# Altium PCB UPCNSL-ABS-FLS-RFS.PcbDoc
Units mm, origin at the board's own origin, x right, y up, seen from the top; angles counter-clockwise.
Board outline 96 x 90 mm, 2 copper layers (Top Layer, Bottom Layer), stack 1.671 mm thick; 44 components, 32 nets, 209 pads, 165 vias.
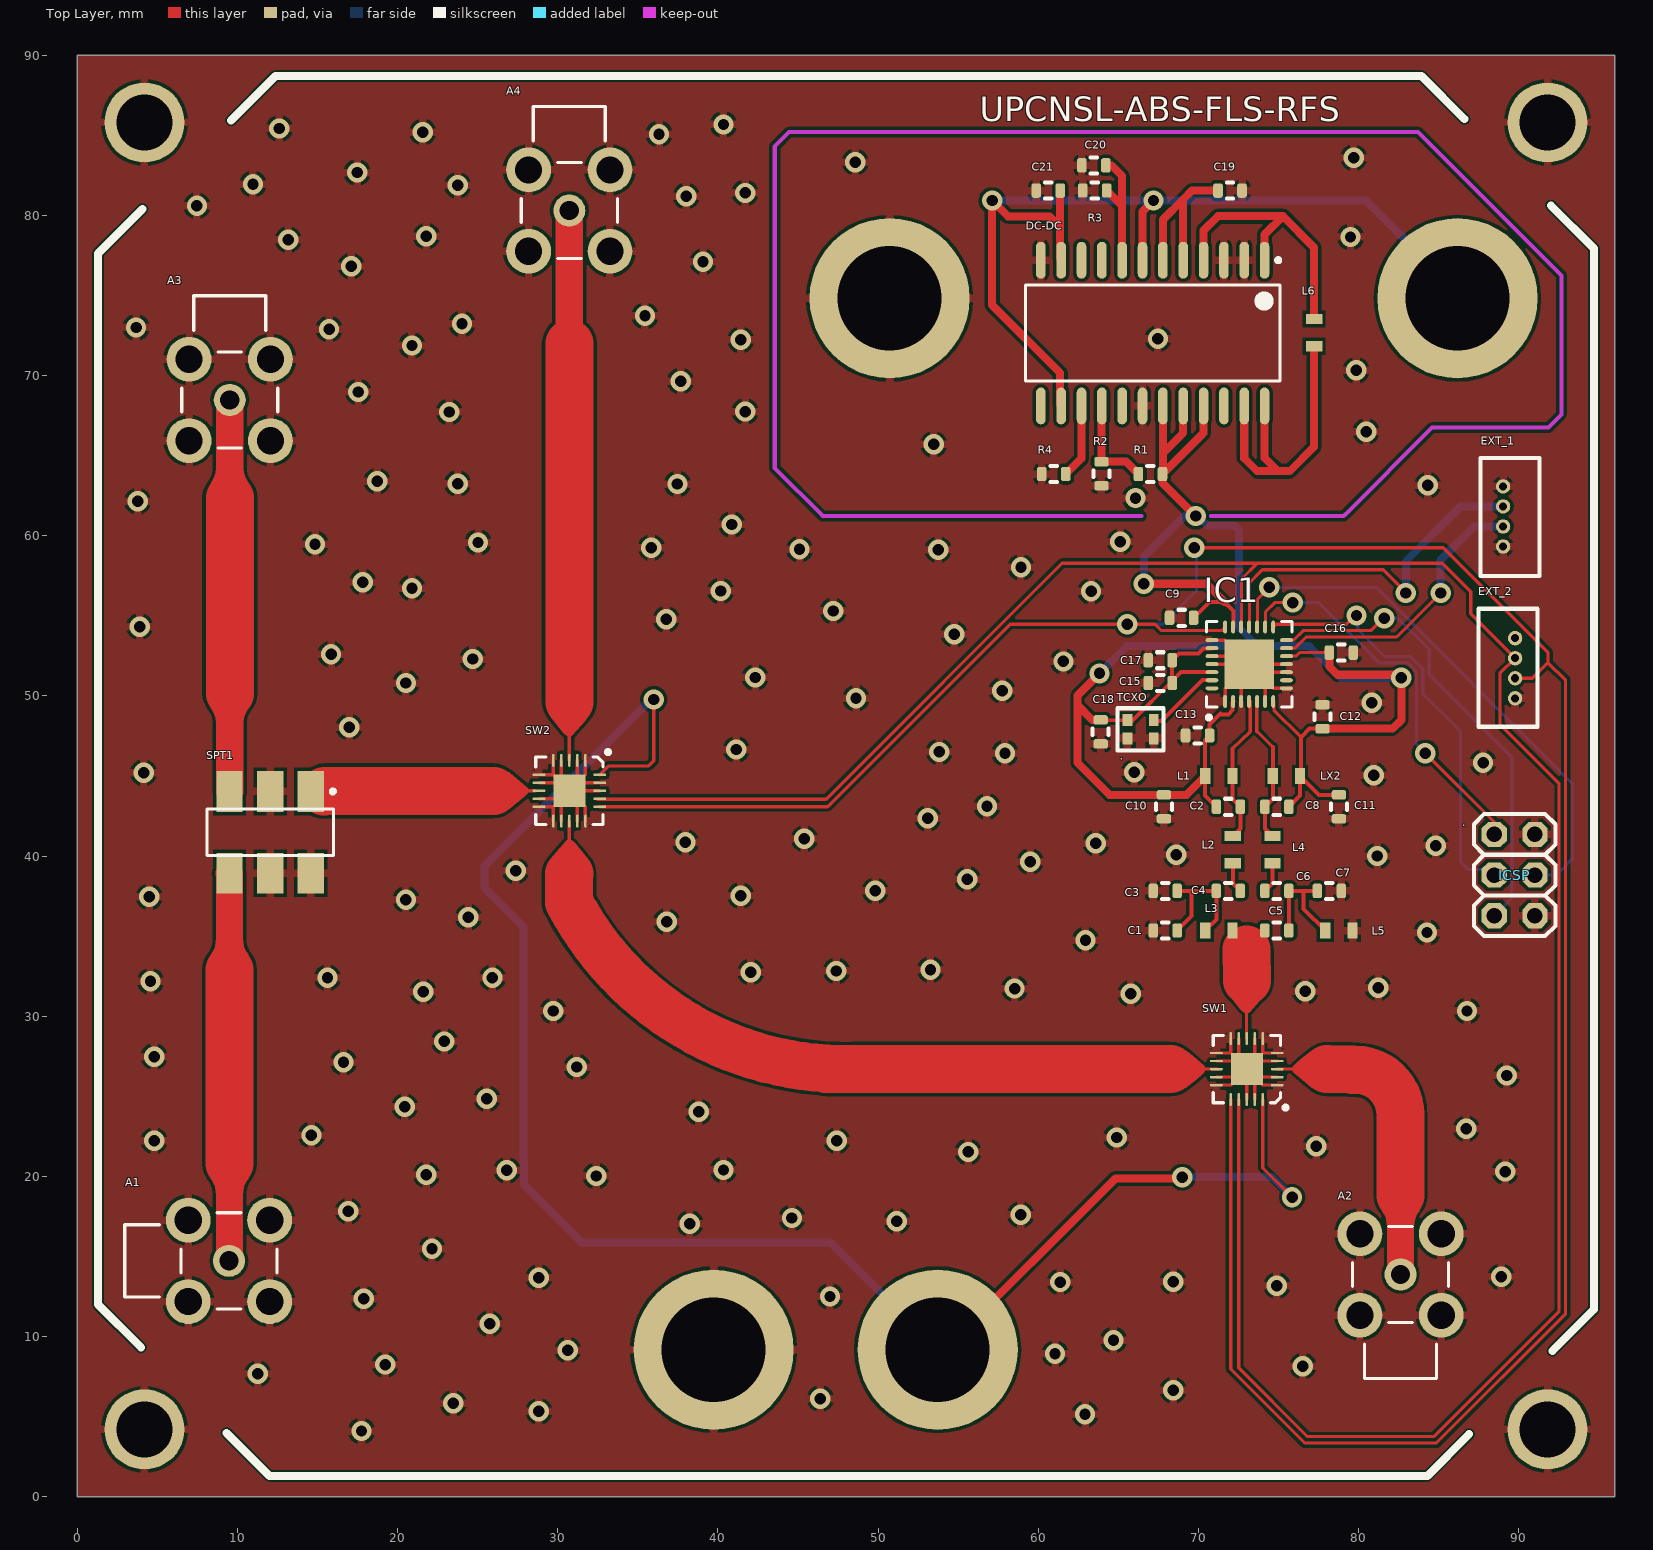
[diagram p0: Top Layer view]
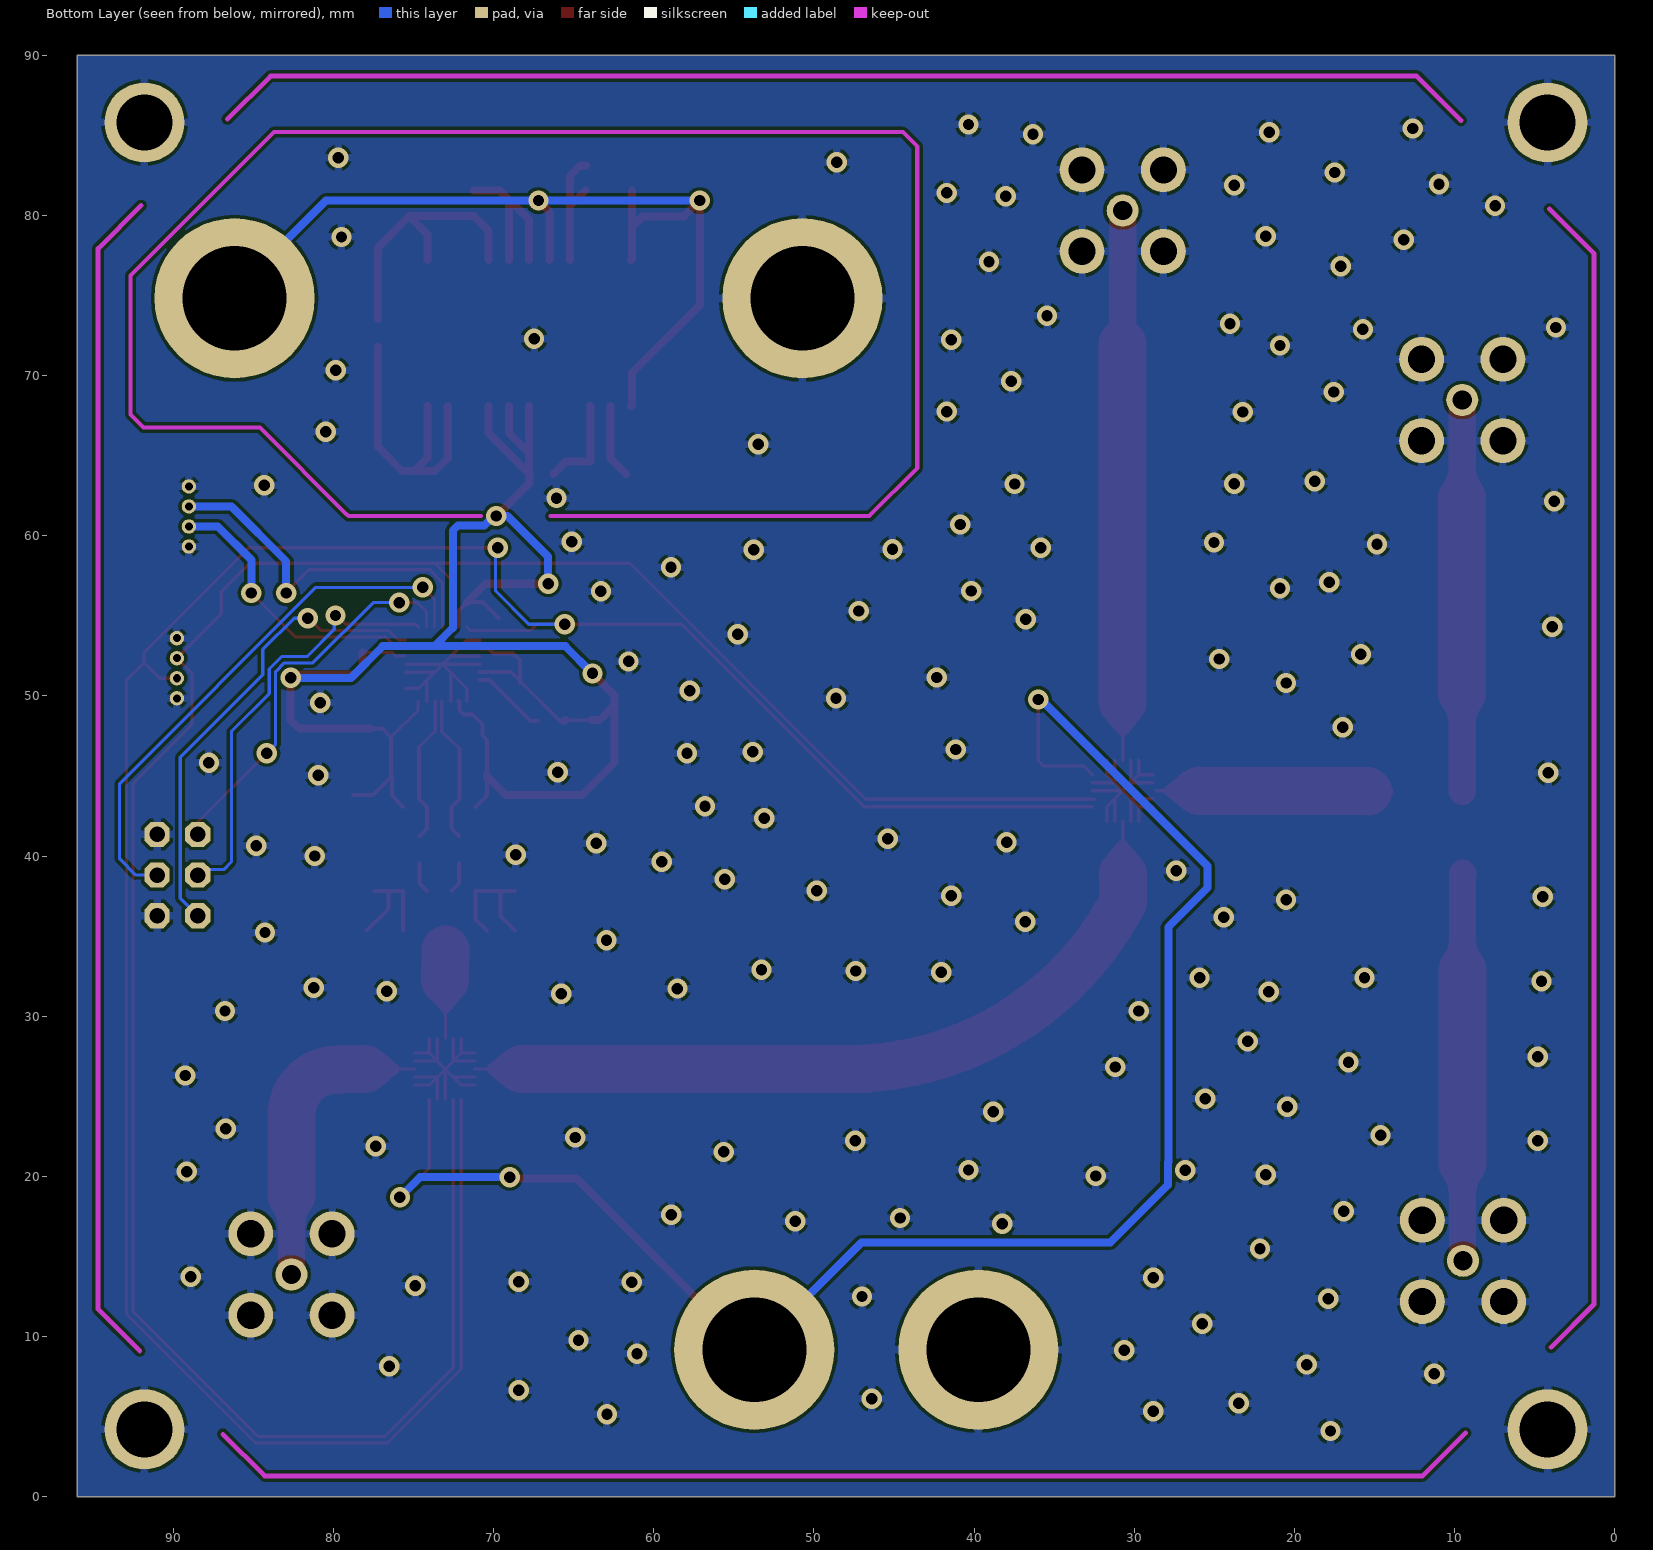
[diagram p1: Bottom Layer view, seen from below]
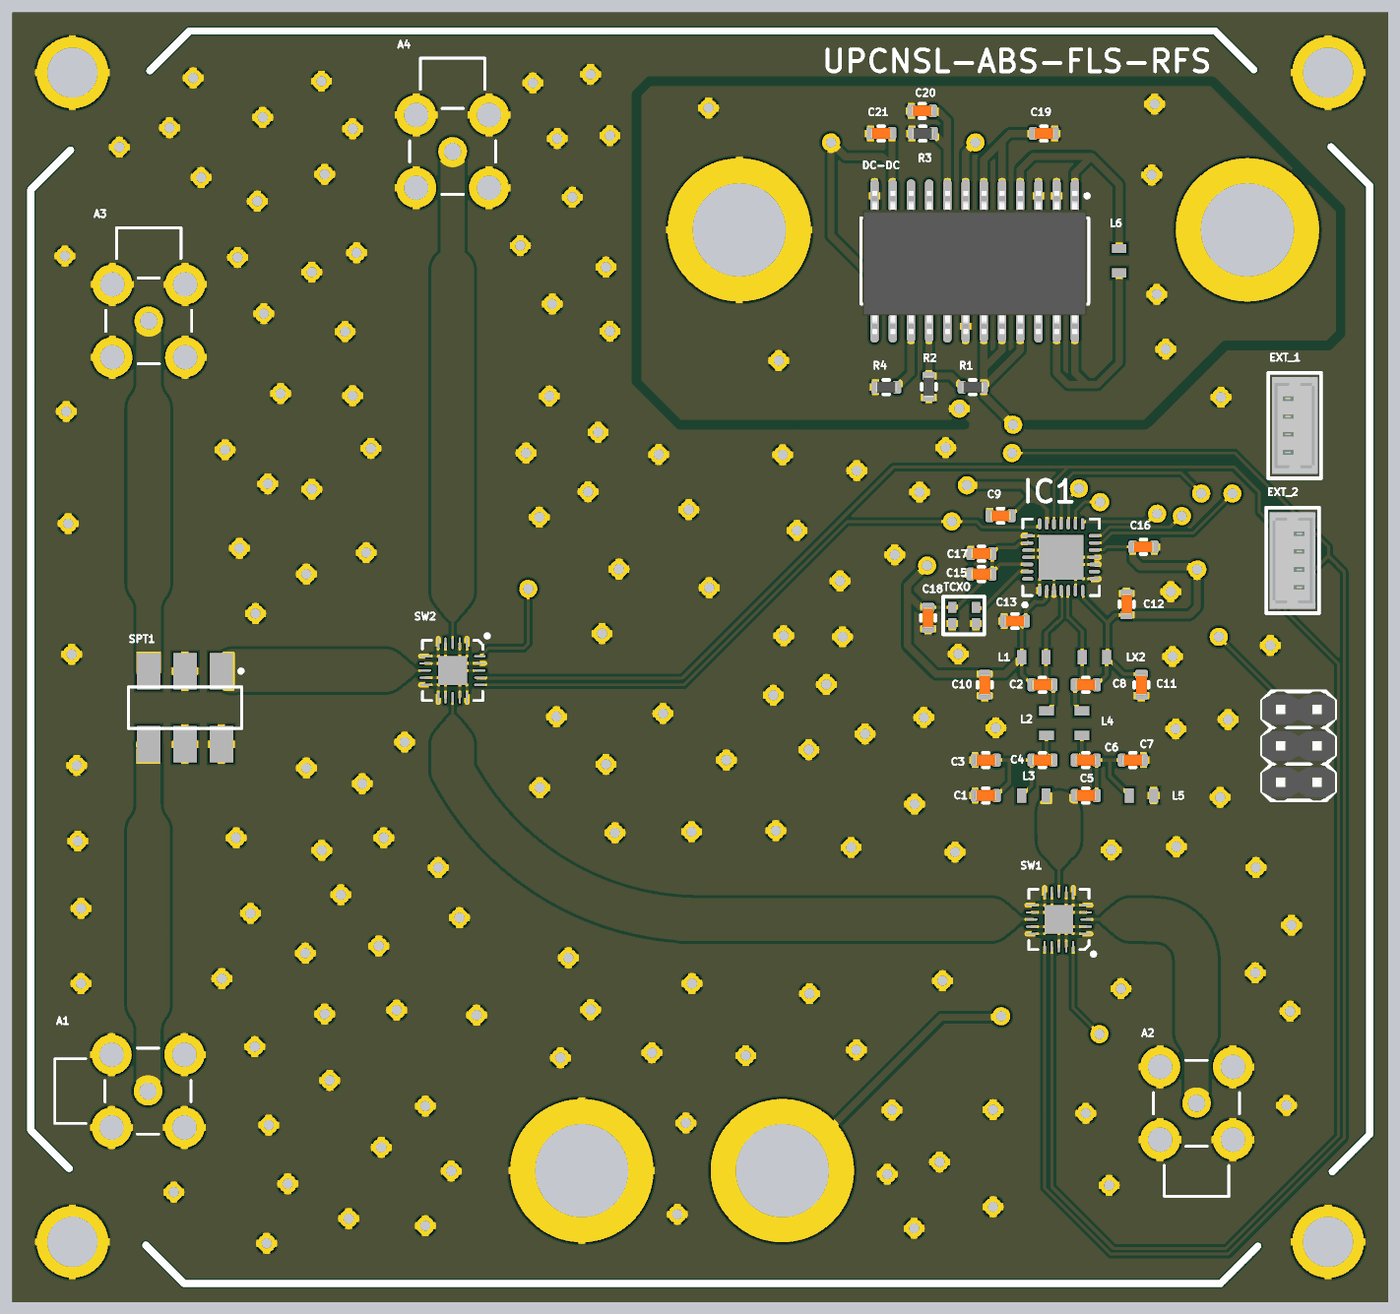
[diagram p2: 3D render of the assembled board from above, using the file's embedded part models]

## Layer stack, top to bottom
Top Solder: solder mask 0.0102, Solder Resist, Dk 3.5
Top Layer: signal copper 0.0356
Dielectric 1: core 1.6, FR-4, Dk 4.2
Bottom Layer: signal copper 0.0356
Bottom Solder: solder mask 0.0102, Solder Resist, Dk 3.5

## Board outline
0,0 96,0 96,90 0,90

## Design rules (kind name [scope] priority, off if disabled: settings)
Clearance [All] p1: gap=0.2
PlaneConnect [All] p1: planeconnectstyle=Relief reliefexpansion=0.508 reliefentries=4 reliefconductorwidth=0.5 reliefairgap=0.254
PolygonConnect [All] p1: connectstyle=Relief reliefconductorwidth=0.5 reliefentries=4 polygonreliefangle="90 Angle" airgapwidth=0.2
RoutingVias [All] p1: holewidth=0.6 width=1 viastyle="Through Hole" minholewidth=0.711 minwidth=1.27 maxholewidth=0.711 maxwidth=1.27
SolderMaskExpansion [All] p1: expansion=0.102
UnpouredPolygon [All] p1: allowunpoured=FALSE
Width [All] p1: maxlimit=2.997 minlimit=0.2 preferedwidth=0.2
28 further rules are at their usual default settings.

## Components (designator, comment, footprint, x,y, rotation, side; value= is the part's Value field where it differs from the comment)
A1 "ANTENNA" MCX5.08-H5 9.475,14.725 r0 top
A2 "SORTIDA AMP EXTERN" MCX5.08-H5 82.625,13.875 r90 top
A3 "ANTENNA" MCX5.08-H5 9.525,68.475 r270 top
A4 "ENTRADA AMP EXTERN" MCX5.08-H5 30.725,80.3 r270 top
C1 "CB1" CAP0603 67.925,35.35 r180 top
C2 "CC1" CAP0603 71.873,43.075 r180 top
C3 "CM1" CAP0603 67.925,37.825 r180 top
C4 "CT1" CAP0603 71.873,37.825 r0 top
C5 "CT2" CAP0603 74.902,37.825 r180 top
C6 "CB2" CAP0603 74.902,35.35 r0 top
C7 "CM2" CAP0603 78.177,37.825 r0 top
C8 "CC2" CAP0603 74.902,43.075 r180 top
C9 "CV1" CAP0603 68.95,54.875 r0 top
C10 "Cap" CAP0603 67.85,43.075 r90 top
C11 "Cap" CAP0603 78.775,43.075 r270 top
C12 "Cap" CAP0603 77.75,48.7 r90 top
C13 "Cap" CAP0603 69.95,47.525 r180 top
C15 "Cap" CAP0603 67.619,50.804 r180 top
C16 "Cap" CAP0603 78.925,52.7 r180 top
C17 "Cap" CAP0603 67.619,52.225 r0 top
C18 "Cap" CAP0603 63.9,47.75 r90 top
C19 "CAP0603" CAP0603 71.975,81.55 r180 top
C20 "CAP0603" CAP0603 63.475,83.125 r0 top
C21 "CAP0603" CAP0603 60.625,81.55 r180 top
DC-DC "LTC3128" "DW024 (LTC3128)" 67.15,72.65 r270 top
EXT_1 "HEADER_CONNECTION" HEADER_CONNECTION 89.025,63.075 r270 top
EXT_2 "HEADER_CONNECTION" HEADER_CONNECTION 89.775,49.85 r90 top
IC1 "AX5042" AX5042 73.175,51.975 r90 top
ICSP "3X2M" "Header 3x2" 88.475,41.35 r0 top
L1 "LX1" INDUCTOR(1608) 71.275,45 r0 top
L2 "LT1" INDUCTOR(1608) 72.15,40.4 r270 top
L3 "LB2" INDUCTOR(1608) 71.275,35.35 r0 top
L4 "LT2" INDUCTOR(1608) 74.625,40.4 r90 top
L5 "LB1" INDUCTOR(1608) 78.775,35.35 r180 top
L6 "Inductor" INDUCTOR(1608) 77.225,72.675 r270 top
LX2 "LX2" INDUCTOR(1608) 75.5,45 r0 top
R1 "RES0603" RES0603 67.008,63.85 r0 top
R2 "RES0603" RES0603 63.95,63.875 r90 top
R3 "RES0603" RES0603 63.525,81.55 r0 top
R4 "RES0603" RES0603 60.975,63.85 r0 top
SPT1 "2 Way -0º split" "SOTFL254P691X411-6N(splitter 2 way-0)" 12.05,41.48 r270 top
SW1 "Switch" SWITCH 73.025,26.7 r180 top
SW2 "Switch" SWITCH 30.725,44.075 r270 top
TCXO "CRYSTAL" "CRYSTAL TG-5006CJ-24L" 65.575,47.35 r0 top

## Footprints (in the part's own frame and the unit in brackets; to place one, negate y for a bottom-side part, rotate by r counter-clockwise, add the part's x,y. Pads: shape width x height; smd on the part's side, far side on the other; paste and mask are expansions set on the pad)
AX5042 [mm] "AXSEM transceiver for RF comm"
  oval 0.8x0.25 smd: 1(-2.325,1.5) 2(-2.325,1) 3(-2.325,0.5) 4(-2.325,0) 5(-2.325,-0.5) 6(-2.325,-1) 7(-2.325,-1.5) 15(2.325,-1.5) 16(2.325,-1) 17(2.325,-0.5) 18(2.325,0) 19(2.325,0.5) 20(2.325,1) 21(2.325,1.5)
  oval 0.25x0.8 smd: 8(-1.5,-2.325) 9(-1,-2.325) 10(-0.5,-2.325) 11(0,-2.325) 12(0.5,-2.325) 13(1,-2.325) 14(1.5,-2.325) 22(1.5,2.325) 23(1,2.325) 24(0.5,2.325) 25(0,2.325) 26(-0.5,2.325) 27(-1,2.325) 28(-1.5,2.325)
  rect 3.1x3.1 smd: 29(0,0)
  silkscreen extent -3.45,-2.68 2.68,2.67, body extent -2.52,-2.53 2.53,2.52, height 0.9
CAP0603 [mm] "Capacitor Chip Inductor, Body 0.6x0.3mm, IPC High Density"
  rrect50% 0.6x0.9 smd: 1(-0.75,0) 2(0.75,0)
  silkscreen extent -0.2,-0.5 0.2,0.5, body extent -0.76,-0.38 0.76,0.38, height 0.76
"CRYSTAL TG-5006CJ-24L" [mm] "MINIATURE SIZE LOW PROFILE  HIGH STABILITY 13-52 MHz"
  rect 0.6x0.75 smd: 1(0,0) 2(1.65,0) 3(1.65,1.13) 4(0,1.13)
  silkscreen extent -0.63,-0.75 2.25,1.88, body extent -0.13,-0.38 1.88,1.5, height 0.8
"DW024 (LTC3128)" [mm] "24-Pin Plastic Small Outline Integrated Circuit 1.27 mm Pitch, IPC Medium Density"
  oval 2.3x0.6 smd: 1(-4.55,6.985) 2(-4.55,5.715) 3(-4.55,4.445) 4(-4.55,3.175) 5(-4.55,1.905) 6(-4.55,0.635) 7(-4.55,-0.635) 8(-4.55,-1.905) 9(-4.55,-3.175) 10(-4.55,-4.445) 11(-4.55,-5.715) 12(-4.55,-6.985) 13(4.55,-6.985) 14(4.55,-5.715) 15(4.55,-4.445) 16(4.55,-3.175) 17(4.55,-1.905) 18(4.55,-0.635) 19(4.55,0.635) 20(4.55,1.905) 21(4.55,3.175) 22(4.55,4.445) 23(4.55,5.715) 24(4.55,6.985)
  silkscreen extent -4.67,-7.95 3,7.96, body extent -4.9,-7.8 5.1,7.8, height 2.77
"Header 3x2" [mm]
  oct 1.575x1.575 hole 0.965: 1(0,0) 2(2.54,0) 3(0,-2.54) 4(2.54,-2.54) 5(0,-5.08) 6(2.54,-5.08)
  silkscreen extent -1.27,-6.35 3.81,1.27, body extent -1.27,-6.35 3.81,1.27, height 8.38
HEADER_CONNECTION [mm] "Headers to extarnal connections (power, signals,...)"
  round 0.9 hole 0.5: 1(0,0) 2(1.25,0) 3(2.5,0) 4(3.75,0)
  silkscreen extent -1.78,-1.4 5.59,2.29, body extent -1.47,-1.15 5.28,2.05, height 4.2
INDUCTOR(1608) [mm] "Inductor for pack 1608"
  rect 0.64x1.02 smd: 1(-0.85,0) 2(0.85,0)
  body extent -0.9,-0.56 0.9,0.56, height 1.02
MCX5.08-H5 [mm] "Connector; RF Coaxial, MCX, Thru-Hole; 5 Position; Right-Angle"
  round 2 hole 1.2: 1(0,0)
  round 2.8 hole 1.7: 2(-2.54,-2.54) 3(2.54,-2.54) 4(2.54,2.54) 5(-2.54,2.54)
  silkscreen extent -6.5,-3 3,3
RES0603 [mm] "Resistor Chip Inductor, Body 0.6x0.3mm, IPC High Density"
  rrect50% 0.6x0.9 smd: 1(-0.75,0) 2(0.75,0)
  silkscreen extent -0.2,-0.5 0.2,0.5, body extent -0.76,-0.38 0.76,0.38, height 0.76
"SOTFL254P691X411-6N(splitter 2 way-0)" [mm] "Splitter for 2 antenna"
  rect 2.54x1.65 smd: 1(-2.55,2.54) 2(-2.55,0) 3(-2.55,-2.54) 4(2.55,-2.54) 5(2.55,0) 6(2.55,2.54)
  silkscreen extent -2.67,-3.95 1.45,4.04, body extent -2.79,-3.94 2.79,3.94, height 4.11
SWITCH [mm] "switch for tx/rx selection"
  oval 0.81x0.15 smd: 1(-1.9,1) 2(-1.9,0.5) 3(-1.9,0) 4(-1.9,-0.5) 5(-1.9,-1) 11(1.9,-1) 12(1.9,-0.5) 13(1.9,0) 14(1.9,0.5) 15(1.9,1)
  oval 0.15x0.81 smd: 6(-1,-1.9) 7(-0.5,-1.9) 8(0,-1.9) 9(0.5,-1.9) 10(1,-1.9) 16(1,1.9) 17(0.5,1.9) 18(0,1.9) 19(-0.5,1.9) 20(-1,1.9)
  rect 2x2 smd: Paddle(0,0)
  silkscreen extent -2.54,-2.1 2.1,2.54, body extent -2,-2 2,2, height 0.9

## Part data
A1 A2 A3 A4: library part COAX-F, "RF Coaxial PCB Connector, MCX; Thru-Hole, Right-Angle Mount Socket, Blunt Post Terminal, 50 Ohm Impedance"
C1 C2 C3 C4 C5 C6 C7 C8 C9: library part Cap, "Capacitor"
C10 C11 C12 C13 C15 C16 C17 C18 C19 C20 C21: "Capacitor"
ICSP: library part "HEADER 3X2", "PIN HEADER"
L1 L2 L3 L4 L5 LX2: library part Inductor, "Inductor"
R1 R2 R3 R4: "Resistor"
SPT1: library part "2 WAY-0º", "Splitter with 0º phase"
SW1 SW2: library part SWITCH

## Free pads (board coordinates)
  round 10 hole 6.5: 0(50.725,74.825) 5(86.175,74.825) 6(53.725,9.175) 7(39.737,9.175)
  round 5 hole 3.5: 8(4.2,85.8) 9(91.8,85.8) 10(91.8,4.2) 11(4.2,4.2)

## Via types
v1: diameter 1.27, hole 0.711, Top Layer to Bottom Layer, 165 vias

## Nets (pads, with @x,y where several pads share a name; then routed paths per layer and width w, separated by ;. In a path a pad name is that pad's centre, name@x,y a point inside that pad or via, vN(x,y) a via of type N, cw(c..) or ccw(c..) an arc to the next point about the centre after c; other vN are vias at no path point)
3V3: pad.6 SW1.20 SW2.20 | length 107.4
  Top Layer w0.2: SW2.20 33.175,45.625 35.675,45.625 36,45.95 v1(36,49.775) ; SW1.20 74.025,20.525 v1(75.85,18.7)
  Top Layer w0.5: pad.6 54.125,9.175 64.825,19.875 68.925,19.875 v1(69,19.95)
  Bottom Layer w0.5: v1(36,49.775) 35.825,49.775 25.425,39.375 25.425,38.025 27.875,35.575 27.875,20.894 27.91,20.859 27.91,19.465 31.5,15.875 47.025,15.875 pad.6 ; v1(69,19.95) 74.6,19.95 v1(75.85,18.7)
5V: C21.1 DC-DC.7 DC-DC.11 DC-DC.14 pad.5 | length 59.7
  Top Layer w0.5: C21.1 61.375,79.25 ; DC-DC.14 61.375,68.16 61.375,70.15 57.125,74.4 v1(57.125,80.925) 58.125,79.925 60.7,79.925 61.375,79.25 ; DC-DC.11 61.375,77.26 61.375,79.25 ; DC-DC.7 66.515,80.24 v1(67.2,80.925)
  Bottom Layer w0.5: v1(57.125,80.925) v1(67.2,80.925) 80.475,80.925 86.175,75.225 pad.5
ANTN: C8.2 IC1.5 L4.2 LX2.1 | length 9.2
  Top Layer w0.2: 73.644,47.762 IC1.5@73.644,49.671 ; 73.694,47.762 74.65,46.806
  Top Layer w0.25: L4.2 74.152,41.723 C8.2 74.65,43.573 LX2.1 74.65,46.806
ANTP: C2.1 IC1.4 L1.2 L2.1 | length 9.3
  Top Layer w0.2: 72.125,46.7 73.244,47.769 IC1.4@73.244,49.671
  Top Layer w0.25: 72.125,46.7 L1.2 72.125,43.573 C2.1 72.623,41.723 L2.1
CLK: IC1.15 ICSP.3 | length 26.9
  Top Layer w0.2: IC1.15@74.694,54.321 74.848,54.475 79.25,54.475 79.8,55.025 79.865,55.025 v1(79.875,55.015)
  Bottom Layer w0.2: v1(79.875,55.015) 79.885,55.015 79.95,54.95 79.95,54.15 81.64,52.46 83.228,52.46 84.01,51.678 84.01,50.14 86.375,47.775 86.375,39.625 86.85,39.15 88.135,39.15 ICSP.3
DATA: EXT_1.2 IC1.18 | length 22.8
  Top Layer w0.2: IC1.18@73.194,54.321 73.194,57.069 74,57.875 81.55,57.875 v1@82.95,56.475
  Bottom Layer w0.5: v1@82.95,56.475 82.95,58.4 86.375,61.825 EXT_1.2
  other v1: 82.95,56.425
DCLK: EXT_2.2 IC1.21 SW1.16 SW2.16 | length 163.8
  Top Layer w0.2: SW2.16 46.85,43.075 58.25,54.475 v1(65.55,54.475) 67.3,54.475 67.7,54.075 71.448,54.075 IC1.21@71.694,54.321 ; v1@69.875,59.25 85.3,59.25 91.825,52.725 91.825,52.075 ; SW1.16 72.025,7.975 76.65,3.35 84.85,3.35 92.925,11.425 92.925,50.975 91.825,52.075 ; EXT_2.2 90.85,51.1 91.825,52.075
  Bottom Layer w0.2: v1(65.55,54.475) 67.8,54.475 69.875,56.55 v1@69.875,59.25
  other v1: 69.75,59.25
GND: A1.2 A1.3 A1.4 A1.5 A2.2 A2.3 A2.4 A2.5 A3.2 A3.3 A3.4 A3.5 A4.2 A4.3 A4.4 A4.5 C1.2 C3.2 C7.2 C9.1 C10.1 C11.2 C12.2 C13.2 C15.2 C16.1 C17.1 C18.1 C19.1 C20.1 C21.2 DC-DC.2 DC-DC.3 DC-DC.12 DC-DC.18 EXT_1.1 EXT_1.4 EXT_2.1 EXT_2.4 IC1.1 IC1.3 IC1.6 IC1.8 IC1.10 IC1.11 IC1.22 IC1.24 IC1.25 IC1.29 ICSP.2 ICSP.6 L5.1 pad.0 pad.7 pad.8 pad.9 pad.10 pad.11 R2.1 R3.1 R4.1 SPT1.2 SPT1.5 SPT1.6 SW1.1 SW1.2 SW1.4 SW1.5 SW1.6 SW1.7 SW1.9 SW1.10 SW1.11 SW1.12 SW1.14 SW1.15 SW1.18 SW1.19 SW1.Paddle SW2.1 SW2.2 SW2.4 SW2.5 SW2.6 SW2.7 SW2.9 SW2.10 SW2.11 SW2.12 SW2.14 SW2.15 SW2.18 SW2.19 SW2.Paddle TCXO.1 TCXO.2 | length 65.8
  Top Layer w0.2: SW2.10 SW2.Paddle@29.725,43.075 ; SW2.9 SW2.Paddle@30.225,43.575 ; SW2.7 SW2.Paddle@30.225,44.575 ; SW2.6 SW2.Paddle@29.725,45.075 ; SW2.11 SW2.Paddle@29.725,43.075 ; SW2.5 29.725,45.075 ; SW2.12 SW2.Paddle@30.225,43.575 ; SW2.4 SW2.Paddle@30.225,44.575 ; SW2.14 SW2.Paddle@31.225,43.575 ; SW2.2 SW2.Paddle@31.225,44.575 ; SW2.15 31.725,43.075 SW2.Paddle@31.225,43.575 ; SW2.1 31.725,45.075 SW2.Paddle@31.225,44.575 ; SW2.18 SW2.Paddle ; SW2.19 SW2.Paddle@31.225,44.575 ; IC1.25 IC1.29 ; IC1.24 IC1.29@72.675,52.475 ; IC1.22 71.675,53.475 IC1.29@72.675,52.475 ; SW1.15 72.025,25.7 SW1.Paddle@72.525,26.2 ; SW1.14 SW1.Paddle@72.525,26.2 ; SW1.12 SW1.Paddle@72.525,27.2 ; SW1.11 72.025,27.7 ; IC1.1 71.675,50.475 IC1.29@72.675,51.475 ; SW1.10 72.025,27.7 ; SW1.9 SW1.Paddle@72.525,27.2 ; IC1.3 IC1.29@72.675,51.475 ; SW1.18 SW1.Paddle ; SW1.19 SW1.Paddle@73.525,26.2 ; SW1.7 SW1.Paddle@73.525,27.2 ; SW1.6 SW1.Paddle@74.025,27.7 ; IC1.6 IC1.29@74.175,50.975 ; SW1.1 74.025,25.7 SW1.Paddle@73.525,26.2 ; SW1.2 SW1.Paddle@73.525,26.2 ; SW1.4 SW1.Paddle@73.525,27.2 ; SW1.5 74.025,27.7 ; IC1.8 74.675,50.475 IC1.29@74.175,50.975 ; IC1.10 IC1.29@73.675,51.475 ; IC1.11 IC1.29 ; SW2.Paddle@29.725,43.075 SW2.Paddle@30.225,43.575 ; SW2.Paddle@29.725,45.075 SW2.Paddle@30.225,44.575 ; SW2.Paddle@30.225,43.575 SW2.Paddle ; SW2.Paddle@30.225,44.575 SW2.Paddle ; SW2.Paddle SW2.Paddle@31.225,44.575 ; SW2.Paddle SW2.Paddle@31.225,43.575 ; 72.025,27.7 SW1.Paddle@72.525,27.2 ; SW1.Paddle@72.525,26.2 SW1.Paddle ; SW1.Paddle@72.525,27.2 SW1.Paddle ; IC1.29@72.675,51.475 IC1.29 ; IC1.29@72.675,52.475 IC1.29 ; SW1.Paddle SW1.Paddle@73.525,26.2 ; SW1.Paddle SW1.Paddle@73.525,27.2 ; IC1.29 IC1.29@73.675,51.475 ; SW1.Paddle@73.525,27.2 SW1.Paddle@74.025,27.7 ; IC1.29@73.675,51.475 IC1.29@74.175,50.975
  other v1: 17.75,4.1 62.925,5.15 28.825,5.325 23.475,5.825 46.4,6.125 68.425,6.65 11.275,7.675 76.525,8.15 19.225,8.25 61.05,8.925 30.625,9.15 64.7,9.775 25.75,10.8 17.9,12.35 47,12.5 74.9,13.175 61.375,13.4 68.425,13.425 28.825,13.675 88.9,13.725 22.15,15.475 38.25,17.05 51.175,17.2 44.625,17.4 58.9,17.6 16.925,17.825 32.4,20.025 21.8,20.1 89.15,20.3 26.825,20.375 40.35,20.4 55.625,21.525 77.35,21.875 4.8,22.225 47.425,22.225 64.9,22.425 14.625,22.575 86.725,22.975 38.8,24.025 20.45,24.35 25.575,24.85 89.25,26.3 31.2,26.825 16.625,27.125 4.8,27.475 22.925,28.425 29.725,30.325 86.775,30.325 65.775,31.4 21.6,31.525 76.675,31.55 58.525,31.725 81.225,31.775 4.575,32.175 15.625,32.4 25.925,32.4 42.05,32.75 47.4,32.825 53.275,32.9 62.95,34.75 84.275,35.225 36.8,35.9 24.425,36.175 20.525,37.275 4.5,37.45 41.425,37.525 49.825,37.825 55.575,38.55 27.375,39.075 59.5,39.65 81.175,40 68.625,40.075 84.825,40.65 63.6,40.8 37.975,40.85 45.4,41.075 53.1,42.35 56.8,43.1 80.95,45.05 4.15,45.2 66,45.225 87.775,45.825 57.925,46.425 53.825,46.5 41.15,46.65 16.975,48.05 80.825,49.575 48.625,49.85 57.75,50.325 20.525,50.8 42.325,51.15 61.575,52.15 24.7,52.3 15.85,52.6 54.75,53.85 3.9,54.325 36.775,54.775 47.2,55.3 63.3,56.525 40.175,56.55 20.9,56.725 17.825,57.1 58.925,58.025 53.75,59.125 45.1,59.15 35.85,59.25 14.85,59.475 25.025,59.575 65.125,59.625 40.875,60.7 3.775,62.15 66.075,62.35 84.325,63.15 37.475,63.225 23.75,63.25 18.725,63.4 53.475,65.7 80.475,66.5 23.225,67.725 41.7,67.75 17.55,68.975 37.675,69.65 79.85,70.325 20.9,71.875 41.425,72.225 67.475,72.3 15.725,72.9 3.675,73 24.025,73.225 35.45,73.725 17.1,76.825 39.075,77.1 13.175,78.475 79.5,78.65 21.8,78.7 7.475,80.6 38.025,81.2 41.7,81.4 23.75,81.875 10.975,81.95 17.475,82.675 48.575,83.325 79.7,83.6 36.325,85.075 21.575,85.2 12.625,85.425 40.35,85.675
IRQ: EXT_2.3 IC1.19 SW1.17 SW2.17 | length 155.2
  Top Layer w0.2: SW2.17@32.45,43.55 46.759,43.55 61.484,58.275 73.675,58.275 ; SW1.17 72.525,8.041 76.816,3.75 84.684,3.75 92.525,11.591 92.525,44.525 88.825,48.225 88.825,51.4 EXT_2.3 87,55.125 87,56.5 85.225,58.275 73.675,58.275 ; IC1.19@72.694,54.65 72.694,57.294 73.675,58.275
MISO: IC1.16 ICSP.1 | length 24.5
  Top Layer w0.2: IC1.16@74.194,54.321 74.194,55.244 74.775,55.825 v1(75.9,55.825) ; v1(84.175,46.425) 88.475,42.125 ICSP.1
  Bottom Layer w0.2: v1@75.9,55.431 v1(75.9,55.825) ; v1@76.325,55.825 77.525,55.825 81.29,52.06 83.062,52.06 83.61,51.512 83.61,46.99 v1(84.175,46.425)
MOSI: IC1.17 ICSP.4 | length 34
  Top Layer w0.2: IC1.17@73.694,54.321 73.694,56.044 v1(74.425,56.775)
  Bottom Layer w0.2: v1@74.6,56.775 81.1,56.775 93.35,44.525 93.35,39.825 92.335,38.81 ICSP.4
NetC1_1: C1.1 C3.1 C4.1 L3.1 | length 8.1
  Top Layer w0.25: C1.1 69.575,36.25 69.575,37.825 ; C3.1 69.575,37.825 ; L3.1 71.123,36.048 C4.1 69.575,37.825
NetC4_2: C4.2 L2.2 | length 1.9
  Top Layer w0.25: L2.2 72.15,38.298 C4.2
NetC5_1: C5.1 C6.2 C7.1 L5.2 | length 7.3
  Top Layer w0.25: C6.2 C5.1 76.575,37.825 ; C7.1 76.575,37.825 ; L5.2 76.575,36.7 76.575,37.825
NetC5_2: C5.2 L4.1 | length 1.9
  Top Layer w0.25: C5.2 74.625,38.298 L4.1
NetC19_2: C19.2 DC-DC.5 DC-DC.6 | length 10.5
  Top Layer w0.5: DC-DC.6 67.785,79.735 69.055,81.005 ; DC-DC.5 69.055,81.005 ; C19.2 69.6,81.55 69.055,81.005
NetC20_2: C20.2 DC-DC.8 R3.2 | length 7.9
  Top Layer w0.5: C20.2 64.575,83.125 65.245,82.455 65.245,80.58 ; R3.2 65.245,80.58 ; DC-DC.8 65.245,80.58
NetDC-DC_1: DC-DC.1 DC-DC.4 L6.1 | length 17.6
  Top Layer w0.5: DC-DC.4 70.325,79.05 71.225,79.95 75.275,79.95 ; DC-DC.1 74.135,78.81 75.275,79.95 ; L6.1 77.225,78 75.275,79.95
NetDC-DC_15: DC-DC.15 R4.2 | length 4.7
  Top Layer w0.5: R4.2 62.705,64.83 DC-DC.15
NetDC-DC_16: DC-DC.16 R1.1 R2.2 | length 6.1
  Top Layer w0.5: DC-DC.16 63.95,68.075 R2.2 65.483,64.625 R1.1
NetDC-DC_23: DC-DC.23 DC-DC.24 L6.2 | length 19.3
  Top Layer w0.5: DC-DC.23 72.865,64.835 73.675,64.025 74.975,64.025 ; DC-DC.24 74.135,64.865 74.975,64.025 ; L6.2 77.225,65.55 75.7,64.025 74.975,64.025
NetIC1_27: IC1.27 TCXO.3 | length 4.7
  Top Layer w0.25: TCXO.3@67.225,48.43 67.694,48.43 70.26,50.996 IC1.27@70.869,50.996
RF: C6.1 L3.2 SW1.8 | length 5.8
  Top Layer w0.2: SW1.8@73.012,28.6 73.025,32.475
  Top Layer w2.997: 73.016,34.175 73.025,32.225
RF_A1: A1.1 SPT1.4 | length 24.3
  Top Layer w1.7: A1.1 9.51,14.76 9.51,20.803 ; SPT1.4@9.475,38.895 SPT1.4 9.51,32.888
  Top Layer w2.997: 9.51,20.803 9.51,32.888
RF_A2: A2.1 SW1.3 | length 19.2
  Top Layer w0.2: SW1.3 78.025,26.7
  Top Layer w1.7: A2.1 82.625,18.8
  Top Layer w2.996: 78.025,26.7 79.625,26.675 ; 79.626,26.65 cw(c79.809,23.858) 82.607,23.917
  Top Layer w2.997: 82.625,18.8 82.625,23.858
RF_A3: A3.1 SPT1.3 | length 24.5
  Top Layer w1.7: SPT1.3 9.525,44.045 9.525,50.153 ; 9.525,62.368 A3.1
  Top Layer w2.997: 9.525,50.153 9.525,62.368
RF_A4: A4.1 SW2.3 | length 33.2
  Top Layer w0.2: SW2.3 30.725,49.625
  Top Layer w1.7: 30.725,73.15 A4.1
  Top Layer w2.997: 30.725,49.625 30.725,72
RF_SPT: SPT1.1 SW2.8 | length 14.1
  Top Layer w0.2: 26,44.075 SW2.8@28.65,44.075
  Top Layer w1.5: SPT1.1 SPT1.1@15.4,44.03
  Top Layer w2.997: SPT1.1@15.4,44.03 15.445,44.075 26,44.075
RF_SW: SW1.13 SW2.13 | length 51.1
  Top Layer w0.2: 30.725,38.875 SW2.13 ; 68.275,26.7 SW1.13@71.216,26.7
  Top Layer w2.996: 30.725,38.875 30.72,38.87 30.72,37.117 ccw(c47.972,46.187) 48.35,26.7
  Top Layer w2.997: 46.75,26.7 68.275,26.7
SEL: IC1.14 ICSP.5 | length 29.5
  Top Layer w0.2: IC1.14@75.519,53.496 75.971,53.496 76.55,54.075 80.775,54.075 81.55,54.85 v1(81.6,54.85)
  Bottom Layer w0.2: v1(81.6,54.85) 82.459,54.85 84.41,52.899 84.41,51.315 89.562,46.163 89.562,37.357 ICSP.5
SYSCLK: EXT_1.3 IC1.13 | length 17.8
  Top Layer w0.2: IC1.13@75.519,52.996 76.046,52.996 76.725,53.675 82.375,53.675 v1(85.125,56.425)
  Bottom Layer w0.5: v1(85.125,56.425) 85.125,58.475 87.225,60.575 EXT_1.3
V_OUT: C2.2 C8.1 C9.2 C10.2 C11.1 C12.1 C13.1 C15.1 C16.2 C17.2 C18.2 DC-DC.19 DC-DC.20 DC-DC.21 IC1.2 IC1.7 IC1.12 IC1.20 IC1.23 IC1.26 L1.1 LX2.2 R1.2 TCXO.4 | length 129.3
  Top Layer w0.2: C18.2@63.9,48.48 65.525,48.48 TCXO.4 ; IC1.7@74.719,49.671 74.719,49.111 76.415,47.415 ; IC1.12@75.519,52.496 76.112,52.496 76.316,52.7 C16.2
  Top Layer w0.25: TCXO.4@65.575,48.43 65.855,48.43 C15.1@68.369,50.944 ; C15.1 C15.1@68.369,50.944 ; C9.2 70.7,55.875 71.625,55.875 72.194,55.306 IC1.20@72.194,54.321 ; IC1.26@70.869,51.496 70.861,51.488 68.913,51.488 C15.1@68.369,50.944 ; IC1.23@70.869,52.996 70.819,52.946 70.308,52.946 70.012,52.65 68.794,52.65 C17.2 C15.1@68.369,50.944 ; C2.2 70.425,43.773 L1.1 70.425,47.25 C13.1 70.7,48.225 71.375,48.9 71.429,48.846 71.88,48.846 72.144,49.11 72.144,49.621 IC1.2@72.194,49.671 ; C8.1 76.35,43.773 LX2.2 ; C12.1 76.95,47.95 76.415,47.415 76.415,45.065 LX2.2 ; C11.1 77.525,43.825 LX2.2
  Top Layer w0.5: v1(63.825,51.4) 62.45,50.025 62.45,49.425 ; C18.2 63.375,48.5 62.45,49.425 ; TCXO.4@65.525,48.48 TCXO.4@65.575,48.43 ; v1(66.6,57) 70.5,57 71.625,55.875 ; DC-DC.19 67.785,65.15 ; DC-DC.20 69.055,66.42 67.785,65.15 ; v1(69.828,61.228) 67.758,63.298 R1.2 R1.2@67.785,63.877 ; DC-DC.21 70.325,66.417 R1.2@67.785,63.877 ; L1.1 69.25,43.825 C10.2 64.45,43.825 62.45,45.825 62.45,49.425 ; C12.1 82.125,47.95 82.675,48.5 v1(82.675,51.125) 82.481,51.319 78.694,51.319 78.175,51.837 C16.2 ; R1.2@67.785,63.877 67.785,65.15
  Bottom Layer w0.5: v1(63.825,51.4) 65.525,53.1 73.7,53.1 ; v1(66.6,57) 66.6,58.7 69.128,61.228 v1(69.828,61.228) 69.981,61.228 70.561,60.648 72.227,60.648 72.55,60.325 72.55,54.25 73.7,53.1 ; v1(82.675,51.125) 78.9,51.125 76.925,53.1 73.7,53.1
pads on no net: DC-DC.9 DC-DC.10 DC-DC.13 DC-DC.17 DC-DC.22 IC1.9 IC1.28

## Polygon pours and split planes (outlines as drawn)
GND on Bottom Layer "GND" (solid, remove dead copper, pour order 16): 0.05,89.875 0.175,90 96,90 96,0 0,0
GND on Top Layer "GND" (solid, remove dead copper, pour order 14): 0,90 96,90 96,0 0,0

## Keep-outs
Keep-Out Layer:
  lines w0.254: 66.45,61.225 46.55,61.225 43.55,64.225 43.55,84.3 44.45,85.2 83.725,85.2 92.65,76.275 ; 70.8,61.225 79.05,61.225 79.15,61.325 79.175,61.325 84.6,66.75 91.85,66.75 92.675,67.575 92.675,76.25 92.65,76.275 ; 92.65,76.275 92.65,76.275
  lines w0.3: 3.975,9.325 1.3,12 1.3,77.625 4.069,80.394 ; 9.325,3.975 12,1.3 84.3,1.3 86.9,3.9 ; 9.606,85.931 12.375,88.7 83.925,88.7 86.619,86.006 ; 92.006,80.619 94.7,77.925 94.7,11.7 92.1,9.1

## Silkscreen, mask and mechanical layers (free items; w line width, h text height)
Top Overlay:
  lines w0.5: 3.975,9.325 1.3,12 1.3,77.625 4.069,80.394 ; 9.325,3.975 12,1.3 84.3,1.3 86.9,3.9 ; 9.606,85.931 12.375,88.7 83.925,88.7 86.619,86.006 ; 92.006,80.619 94.7,77.925 94.7,11.7 92.1,9.1
  text "UPCNSL-ABS-FLS-RFS" at 56.35,85.875 h1.52
Mechanical 3:
  lines w2: -1,0 ccw(c0,0) 0,-1 ; -1,0 ccw(c0,0) 0,-1 ; -1,0 -1,90 ; -1,90 cw(c0,90) 0,91 ; -1,90 cw(c0,90) 0,91 ; 0,-1 96,-1 ; 0,91 96,91 ; 96,-1 ccw(c96,0) 97,0 ; 96,-1 ccw(c96,0) 97,0 ; 96,91 cw(c96,90) 97,90 ; 96,91 cw(c96,90) 97,90 ; 97,0 97,90
Drill Drawing:
  text ".LEGEND" at 101.08,5.08 h1.52
  text "Drill Drawing." at 101.08,2.54 h1.52

## Dimensions
1.3,1.3 to 94.7,1.3 on Mechanical 1
1.3,1.3 to 1.3,88.7 on Mechanical 1